# Altium PCB iDProx - Panel.PcbDoc
Units mm, origin at the board's own origin, x right, y up, seen from the top; angles counter-clockwise.
Board outline 286 x 128.4 mm, 2 copper layers (Top Layer, Bottom Layer), stack 1.544 mm thick; 7 components, 0 nets, 9 pads, 0 vias.
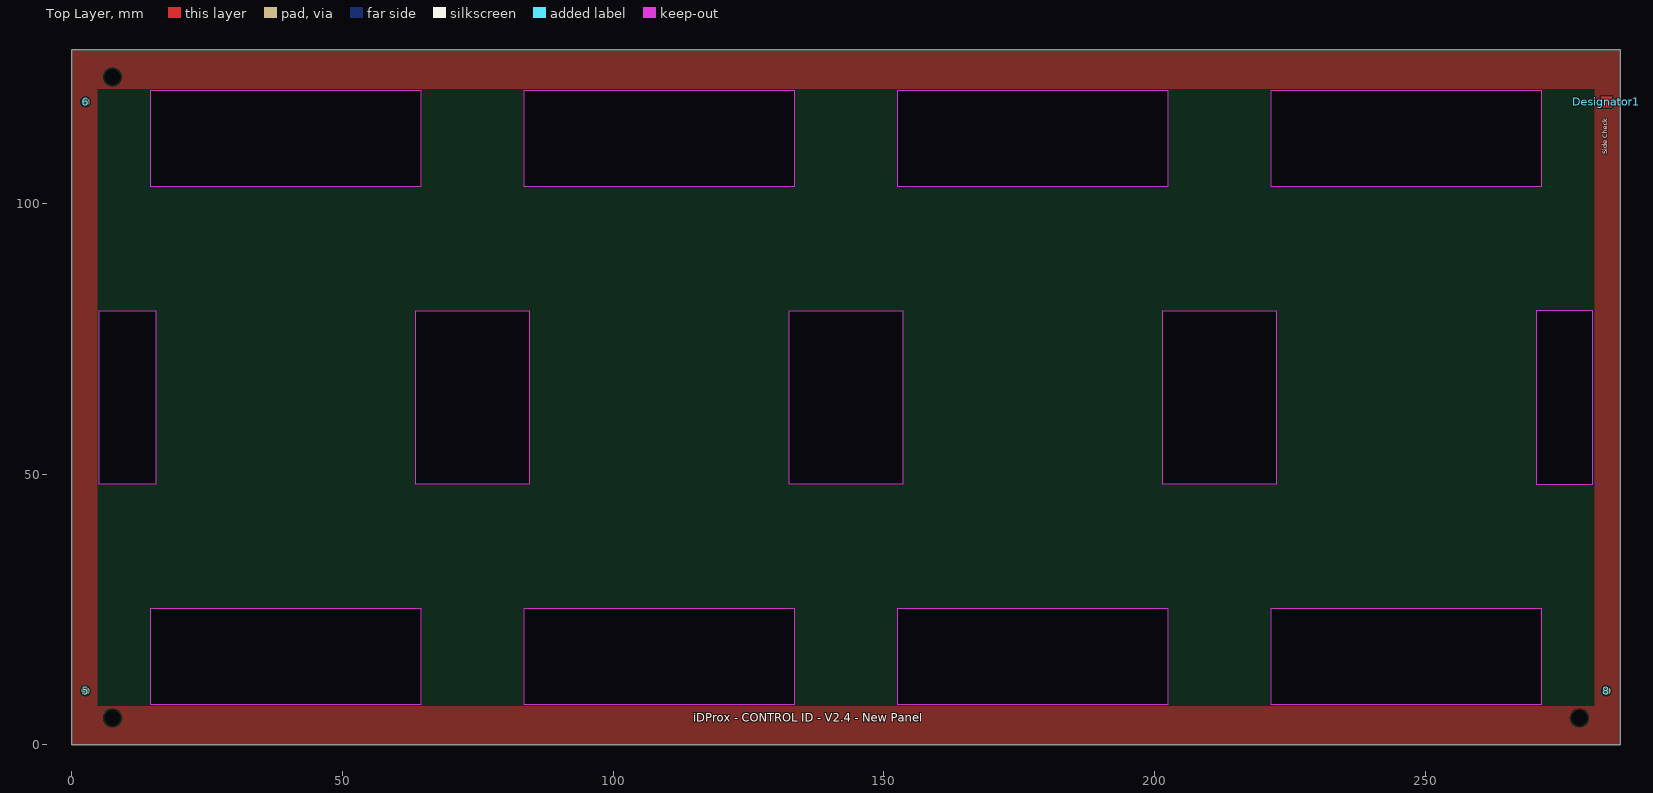
[diagram p0: Top Layer view]
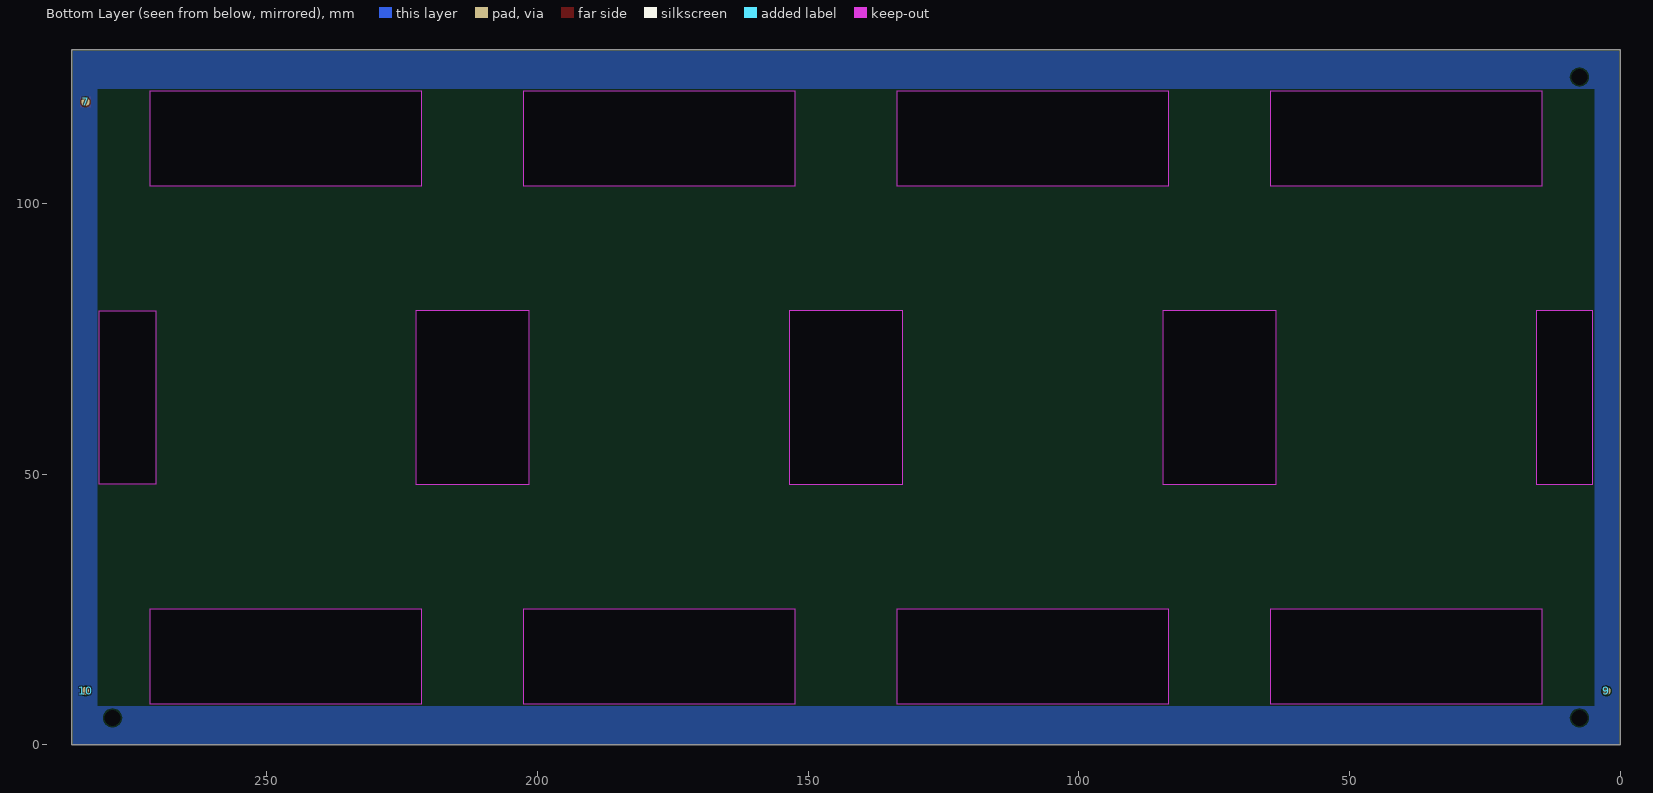
[diagram p1: Bottom Layer view, seen from below]

## Layer stack, top to bottom
Top Solder: solder mask 0.0102, Solder Resist, Dk 3.5
Top Layer: signal copper 0.0356
Dielectric 1: dielectric 1.4732, FR-4, Dk 4.8
Bottom Layer: signal copper 0.0356
Bottom Solder: solder mask 0.0102, Solder Resist, Dk 3.5

## Board outline
0,0 0,128.4 286,128.4 286,0
cut-out: 64.5,103.2 64.5,120.9 14.5,120.9 14.5,103.2
cut-out: 133.5,103.2 133.5,120.9 83.5,120.9 83.5,103.2
cut-out: 202.5,103.2 202.5,120.9 152.5,120.9 152.5,103.2
cut-out: 271.5,103.2 271.5,120.9 221.5,120.9 221.5,103.2
cut-out: 64.5,7.5 64.5,25.2 14.5,25.2 14.5,7.5
cut-out: 133.5,7.5 133.5,25.2 83.5,25.2 83.5,7.5
cut-out: 202.5,7.5 202.5,25.2 152.5,25.2 152.5,7.5
cut-out: 271.5,7.5 271.5,25.2 221.5,25.2 221.5,7.5
cut-out: 281,48.2 281,80.2 270.5,80.2 270.5,48.2
cut-out: 5,48.2 5,80.2 15.5,80.2 15.5,48.2
cut-out: 201.5,48.2 201.5,80.2 222.5,80.2 222.5,48.2
cut-out: 132.5,48.2 132.5,80.2 153.5,80.2 153.5,48.2
cut-out: 63.5,48.2 63.5,80.2 84.5,80.2 84.5,48.2

## Design rules (kind name [scope] priority, off if disabled: settings)
Clearance [All] p1: gap=0.254 ignorepadtopadclearanceinfootprint=FALSE except(0: Arc-Hole Track-Hole SMDPad-Hole THPad-Hole Via-Hole Fill-Hole Poly-Hole Region-Hole Text-Hole)
PolygonConnect [All] p1: connectstyle=Relief reliefconductorwidth=0.254 reliefentries=4 polygonreliefangle="90 Angle" airgapwidth=0.254
RoutingVias [All] p1: holewidth=0.711 width=1.27 viastyle="Through Hole" minholewidth=0.711 minwidth=1.27 maxholewidth=0.711 maxwidth=1.27
SolderMaskExpansion [All] p1: expansion=0.102 istentingtop=FALSE
Width [All] p1: maxlimit=0.254 minlimit=0.254 preferedwidth=0.254
30 further rules are at their usual default settings.

## Components (designator, comment, footprint, x,y, rotation, side; value= is the part's Value field where it differs from the comment)
5 "" FIDUCIAL-1.5X3 2.5,10 r180 top
6 "" FIDUCIAL-1.5X3 2.5,118.8 r0 top
7 "" FIDUCIAL-1.5X3 283.5,118.8 r180 bottom
8 "" FIDUCIAL-1.5X3 283.5,10 r180 top
9 "" FIDUCIAL-1.5X3 2.5,10 r180 bottom
10 "" FIDUCIAL-1.5X3 283.5,10 r180 bottom
Designator1 "Comment" BADMARK 283.5,118.8 r0 top

## Footprints (in the part's own frame and the unit in brackets; to place one, negate y for a bottom-side part, rotate by r counter-clockwise, add the part's x,y. Pads: shape width x height; smd on the part's side, far side on the other; paste and mask are expansions set on the pad)
BADMARK [mm]
  Top Layer region: -1,-1 1,-1 1,1 -1,1
FIDUCIAL-1.5X3 [mm]
  rrect100% 1.5x1.5 smd: 1(0,0)

## Free pads (board coordinates)
  round 0 hole 3 unplated: 0(7.5,5) 0(7.5,123.4) 0(278.5,5)

## Nets (pads, with @x,y where several pads share a name; then routed paths per layer and width w, separated by ;. In a path a pad name is that pad's centre, name@x,y a point inside that pad or via, vN(x,y) a via of type N, cw(c..) or ccw(c..) an arc to the next point about the centre after c; other vN are vias at no path point)
pads on no net: 5.1 6.1 7.1 8.1 9.1 10.1

## Polygon pours and split planes (outlines as drawn)
no net on Top Layer "Top Layer-No Net 3" (solid, pour order 3): 0.254,7.246 0.254,0.254 285.746,0.254 285.746,128.146 0.254,128.146 0.254,7.246 4.746,7.246 4.746,121.154 281.254,121.154 281.254,7.246
no net on Bottom Layer "Top Layer-No Net 3" (solid, pour order 0): 0.254,7.246 0.254,0.254 285.746,0.254 285.746,128.146 0.254,128.146 0.254,7.246 4.746,7.246 4.746,121.154 281.254,121.154 281.254,7.246

## Silkscreen, mask and mechanical layers (free items; w line width, h text height)
Top Overlay:
  text "Side Check" at 284,109.1 h1.52 r90
  text "iDProx - CONTROL ID - V2.4 - New Panel" at 114.8,4.3 h1.52
Mechanical 1:
  lines w0.1: 0,7.5 286,7.5 ; 0,64.2 286,64.2 ; 0,120.9 286,120.9 ; 5,0 5,128.4 ; 39.5,0 39.5,128.4 ; 74,0 74,128.4 ; 108.5,0 108.5,128.4 ; 143,0 143,128.4 ; 177.5,0 177.5,128.4 ; 212,0 212,128.4 ; 246.5,0 246.5,128.4 ; 281,0 281,128.4 ; 0,0 0,128.4 286,128.4 286,0 0,0

## Panel: embedded boards
"iDProx.PcbDoc" at 212,7.5, 1 rows x 1 columns, spacing 56.7 x 34.5, rotation 0
"iDProx.PcbDoc" at 281,7.5, 1 rows x 1 columns, spacing 56.7 x 34.5, rotation 0
"iDProx.PcbDoc" at 212,120.9, 1 rows x 1 columns, spacing 56.7 x 34.5, rotation 180
"iDProx.PcbDoc" at 281,120.9, 1 rows x 1 columns, spacing 56.7 x 34.5, rotation 180
"iDProx.PcbDoc" at 143,7.5, 1 rows x 1 columns, spacing 56.7 x 34.5, rotation 0
"iDProx.PcbDoc" at 212,7.5, 1 rows x 1 columns, spacing 56.7 x 34.5, rotation 0
"iDProx.PcbDoc" at 143,120.9, 1 rows x 1 columns, spacing 56.7 x 34.5, rotation 180
"iDProx.PcbDoc" at 212,120.9, 1 rows x 1 columns, spacing 56.7 x 34.5, rotation 180
"iDProx.PcbDoc" at 74,7.5, 1 rows x 1 columns, spacing 56.7 x 34.5, rotation 0
"iDProx.PcbDoc" at 143,7.5, 1 rows x 1 columns, spacing 56.7 x 34.5, rotation 0
"iDProx.PcbDoc" at 74,120.9, 1 rows x 1 columns, spacing 56.7 x 34.5, rotation 180
"iDProx.PcbDoc" at 143,120.9, 1 rows x 1 columns, spacing 56.7 x 34.5, rotation 180
"iDProx.PcbDoc" at 74,120.9, 1 rows x 1 columns, spacing 56.7 x 34.5, rotation 180
"iDProx.PcbDoc" at 5,120.9, 1 rows x 1 columns, spacing 56.7 x 34.5, rotation 180
"iDProx.PcbDoc" at 74,7.5, 1 rows x 1 columns, spacing 56.7 x 34.5, rotation 0
"iDProx.PcbDoc" at 5,7.5, 1 rows x 1 columns, spacing 56.7 x 34.5, rotation 0